# EAGLE board PrelimanaryV2 (EAGLE 9.5.2)
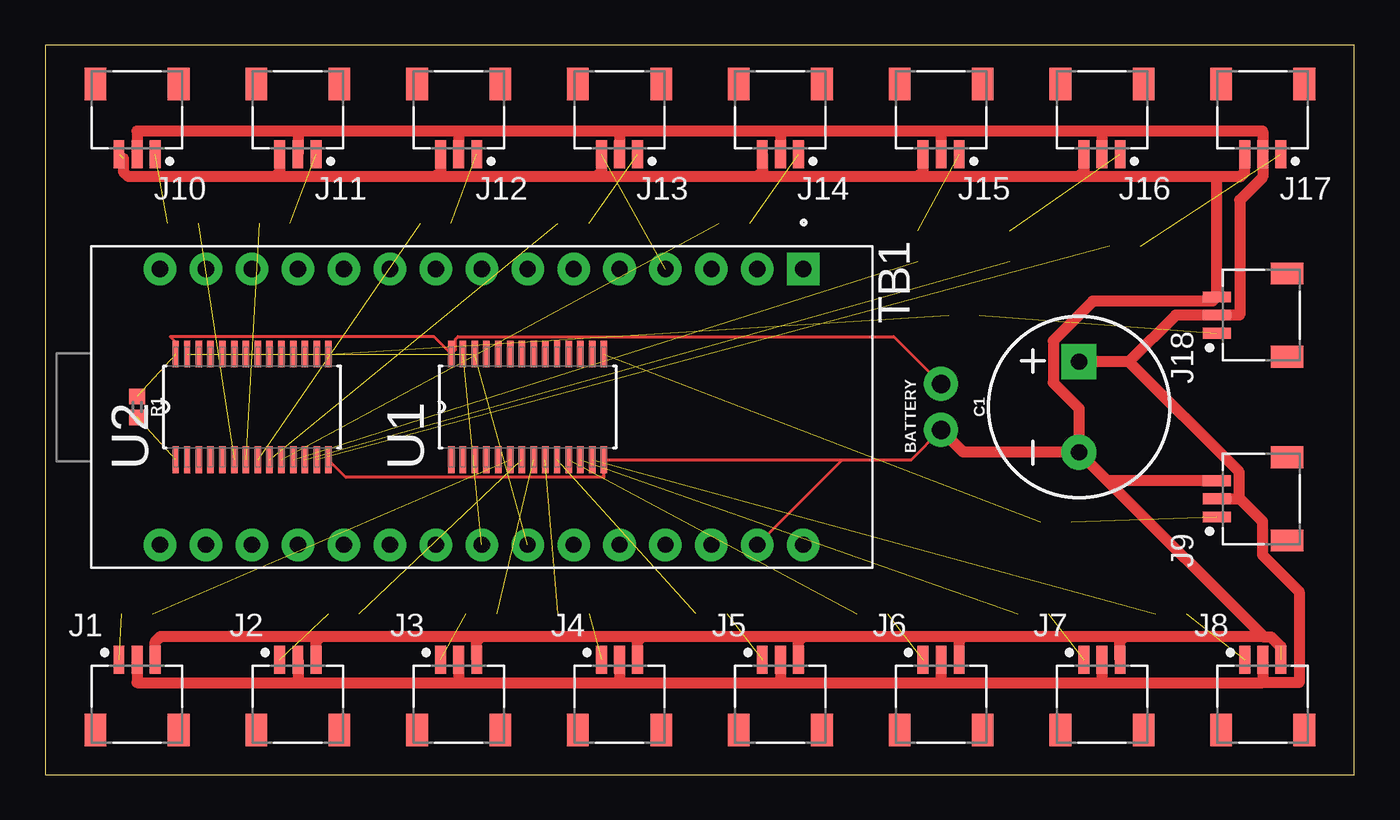
[diagram p0: board, top side]
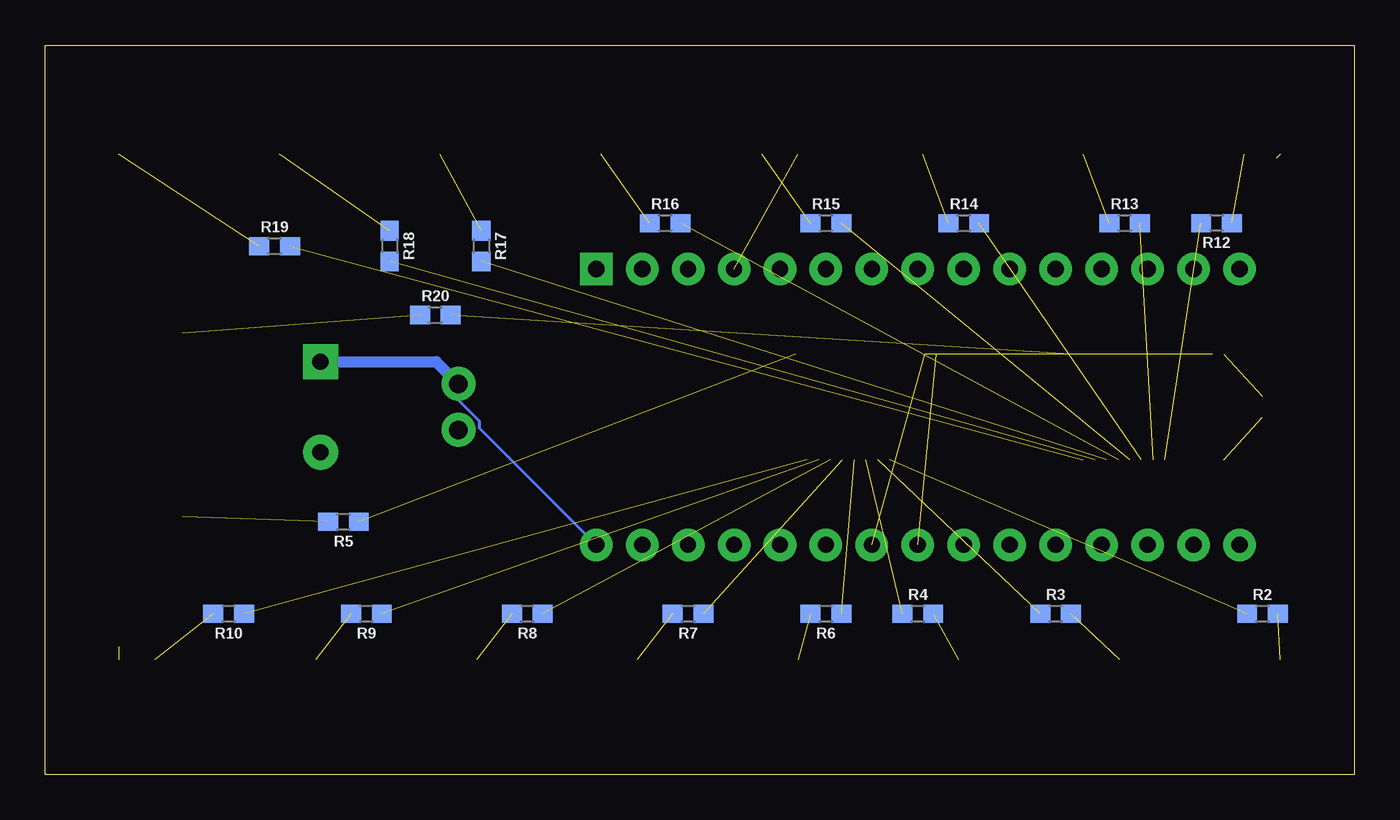
[diagram p1: board, bottom side, seen from below]

Size 72.37 x 40.31 mm. Coordinates in mm from the lower left corner, seen from the top.
Outline: 0,0 72.37,0 72.37,40.31 0,40.31 0,0
Copper layers (1*16): Top 0.035mm / dielectric 1.5mm / Bottom 0.035mm
Design rules "default": minimum track width 6mil, minimum drill 0.35mm, track to track 6mil, track to pad 6mil, pad to pad 6mil, via to via 6mil, smd to smd 6mil, copper to edge 40mil, drill to drill 6mil, minimum pad ring 10mil, minimum via ring 8mil, stop-mask expansion 4mil, vias tented up to drill 0mil, thermal gap 10mil

## Footprints (pad centres in the part's own frame; a part is rotated, then mirrored left to right if it is on the bottom)
1X02_NO_SILK = drill 1.016 pad 1.88: 1 0,0; 2 2.54,0
CPOL-RADIAL-5MM-10MM = drill 0.9 pad 1.93 square: + 2.5,0 | drill 0.9 pad 1.93: - -2.5,0
JST_SM03B-SRSS-TB(LF)(SN) = smd 0.6 x 1.55: 1 -1,0; 2 0,0; 3 1,0 | smd 1.2 x 1.8: S1 -2.3,-3.875; S2 2.3,-3.875
0402 = smd 0.85 x 0.9: 1 -0.58,0; 2 0.58,0
0603 = smd 1.1 x 1: 1 -0.85,0; 2 0.85,0
SHIELD_ARDUINO_NANO = drill 0.9 pad 1.8 square: 1 -7.62,17.78 | drill 0.9 pad 1.8: 2 -7.62,15.24; 3 -7.62,12.7; 4 -7.62,10.16; 5 -7.62,7.62; 6 -7.62,5.08; 7 -7.62,2.54; 8 -7.62,0; 9 -7.62,-2.54; 10 -7.62,-5.08; 11 -7.62,-7.62; 12 -7.62,-10.16; 13 -7.62,-12.7; 14 -7.62,-15.24; 15 -7.62,-17.78; 16 7.62,-17.78; 17 7.62,-15.24; 18 7.62,-12.7; 19 7.62,-10.16; 20 7.62,-7.62; 21 7.62,-5.08; 22 7.62,-2.54; 23 7.62,0; 24 7.62,2.54; 25 7.62,5.08; 26 7.62,7.62; 27 7.62,10.16; 28 7.62,12.7; 29 7.62,15.24; 30 7.62,17.78
SOP65P640X110-28N = smd 1.473 x 0.356: 1 -2.921,4.216; 2 -2.921,3.581; 3 -2.921,2.921; 4 -2.921,2.286; 5 -2.921,1.626; 6 -2.921,0.965; 7 -2.921,0.33; 8 -2.921,-0.33; 9 -2.921,-0.965; 10 -2.921,-1.626; 11 -2.921,-2.286; 12 -2.921,-2.921; 13 -2.921,-3.581; 14 -2.921,-4.216; 15 2.921,-4.216; 16 2.921,-3.581; 17 2.921,-2.921; 18 2.921,-2.286; 19 2.921,-1.626; 20 2.921,-0.965; 21 2.921,-0.33; 22 2.921,0.33; 23 2.921,0.965; 24 2.921,1.626; 25 2.921,2.286; 26 2.921,2.921; 27 2.921,3.581; 28 2.921,4.216

## Placement (x,y rotation side)
BATTERY  [1X02_NO_SILK]  49.53,19.05 90 top
C1  1mF  [CPOL-RADIAL-5MM-10MM]  57.15,20.32 90 top
J1  SM03B-SRSS-TB(LF)(SN)  [JST_SM03B-SRSS-TB(LF)(SN)]  5.08,6.35 0 top
J2  SM03B-SRSS-TB(LF)(SN)  [JST_SM03B-SRSS-TB(LF)(SN)]  13.97,6.35 0 top
J3  SM03B-SRSS-TB(LF)(SN)  [JST_SM03B-SRSS-TB(LF)(SN)]  22.86,6.35 0 top
J4  SM03B-SRSS-TB(LF)(SN)  [JST_SM03B-SRSS-TB(LF)(SN)]  31.75,6.35 0 top
J5  SM03B-SRSS-TB(LF)(SN)  [JST_SM03B-SRSS-TB(LF)(SN)]  40.64,6.35 0 top
J6  SM03B-SRSS-TB(LF)(SN)  [JST_SM03B-SRSS-TB(LF)(SN)]  49.53,6.35 0 top
J7  SM03B-SRSS-TB(LF)(SN)  [JST_SM03B-SRSS-TB(LF)(SN)]  58.42,6.35 0 top
J8  SM03B-SRSS-TB(LF)(SN)  [JST_SM03B-SRSS-TB(LF)(SN)]  67.31,6.35 0 top
J9  SM03B-SRSS-TB(LF)(SN)  [JST_SM03B-SRSS-TB(LF)(SN)]  64.77,15.24 90 top
J10  SM03B-SRSS-TB(LF)(SN)  [JST_SM03B-SRSS-TB(LF)(SN)]  5.08,34.29 180 top
J11  SM03B-SRSS-TB(LF)(SN)  [JST_SM03B-SRSS-TB(LF)(SN)]  13.97,34.29 180 top
J12  SM03B-SRSS-TB(LF)(SN)  [JST_SM03B-SRSS-TB(LF)(SN)]  22.86,34.29 180 top
J13  SM03B-SRSS-TB(LF)(SN)  [JST_SM03B-SRSS-TB(LF)(SN)]  31.75,34.29 180 top
J14  SM03B-SRSS-TB(LF)(SN)  [JST_SM03B-SRSS-TB(LF)(SN)]  40.64,34.29 180 top
J15  SM03B-SRSS-TB(LF)(SN)  [JST_SM03B-SRSS-TB(LF)(SN)]  49.53,34.29 180 top
J16  SM03B-SRSS-TB(LF)(SN)  [JST_SM03B-SRSS-TB(LF)(SN)]  58.42,34.29 180 top
J17  SM03B-SRSS-TB(LF)(SN)  [JST_SM03B-SRSS-TB(LF)(SN)]  67.31,34.29 180 top
J18  SM03B-SRSS-TB(LF)(SN)  [JST_SM03B-SRSS-TB(LF)(SN)]  64.77,25.4 90 top
R1  10k  [0402]  5.08,20.32 270 top
R2  220  [0603]  5.08,8.89 0 bottom
R3  220  [0603]  16.51,8.89 0 bottom
R4  220  [0603]  24.13,8.89 0 bottom
R5  220  [0603]  55.88,13.97 180 bottom
R6  220  [0603]  29.21,8.89 180 bottom
R7  220  [0603]  36.83,8.89 180 bottom
R8  220  [0603]  45.72,8.89 180 bottom
R9  220  [0603]  54.61,8.89 180 bottom
R10  220  [0603]  62.23,8.89 180 bottom
R12  220  [0603]  7.62,30.48 180 bottom
R13  220  [0603]  12.7,30.48 0 bottom
R14  220  [0603]  21.59,30.48 0 bottom
R15  220  [0603]  29.21,30.48 0 bottom
R16  220  [0603]  38.1,30.48 0 bottom
R17  220  [0603]  48.26,29.21 270 bottom
R18  220  [0603]  53.34,29.21 270 bottom
R19  220  [0603]  59.69,29.21 0 bottom
R20  220  [0603]  50.8,25.4 0 bottom
TB1  ARDUINO_NANO  [SHIELD_ARDUINO_NANO]  24.13,20.32 270 top
U1  PCA9685PW,118  [SOP65P640X110-28N]  26.67,20.32 90 top
U2  PCA9685PW,118  [SOP65P640X110-28N]  11.43,20.32 90 top

## Library data of the parts
BATTERY = SparkFun-Connectors
C1 = SparkFun-Capacitors; PROD_ID: CAP-09538
J1-J18 = JST-SH; AVAILABILITY: Unavailable; DESCRIPTION: CONN HEADER SMD R/A 3POS 1MM; MF: JST Sales; MP: SM03B-SRSS-TB_LF__SN_; PACKAGE: None; PRICE: None
R1 = SparkFun-Resistors; PROD_ID: RES-14241
R2-R10 R12-R20 = SparkFun-Resistors; PROD_ID: RES-07861
TB1 = ARDUINO_NANO; AVAILABILITY: Unavailable; DESCRIPTION: Dev.kit: Arduino; UART; ICSP, USB B mini, pin strips; MF: Arduino; MP: ARDUINO NANO; PACKAGE: None; PRICE: None
U1 U2 = PCA9685PW_118; AVAILABILITY: Unavailable; DESCRIPTION: PCA9685 Series 5.5V 25 mA 1 MHz 12-bit PWM Fm+I2C-Bus LED Controller - TSSOP-28; MF: NXP USA; MP: PCA9685PW,118; PACKAGE: TSSOP-28 NXP Semiconductors; PRICE: None

## Nets
3V3: TB1.17
+5V: TB1.27
AREF: TB1.18
N$1: R2.1 U1.6
N$2: J2.1 R3.2
N$3: J3.1 R4.2
N$4: BATTERY.1 C1.- J1.3 J2.3 J3.3 J4.3 J5.3 J6.3 J7.3 J8.3 J9.3 J10.3 J11.3 J12.3 J13.3 J14.3 J15.3 J16.3 J17.3 J18.3 TB1.4 TB1.29 U1.14 U2.14
N$5: TB1.23 U1.27 U2.27
N$6: TB1.24 U1.26 U2.26
N$7: J1.1 R2.2
N$8: J4.1 R6.2
N$9: J5.1 R7.2
N$10: J6.1 R8.2
N$11: J7.1 R9.2
N$12: J8.1 R10.2
N$13: J9.1 R5.2
N$14: J10.1 R12.1
N$15: J11.1 R13.1
N$16: J12.1 R14.1
N$17: J13.1 R15.1
N$18: J14.1 R16.1
N$19: J15.1 R17.1
N$20: J16.1 R18.1
N$21: J17.1 R19.1
N$22: J18.1 R20.1
N$23: BATTERY.2 C1.+ J1.2 J2.2 J3.2 J4.2 J5.2 J6.2 J7.2 J8.2 J9.2 J10.2 J11.2 J12.2 J13.2 J14.2 J15.2 J16.2 J17.2 J18.2 R1.1 TB1.30 U1.28 U2.28
N$24: R3.1 U1.7
N$25: R4.1 U1.8
N$26: R6.1 U1.9
N$27: R7.1 U1.10
N$28: R8.1 U1.11
N$29: R9.1 U1.12
N$30: R10.1 U1.13
N$31: R12.2 U2.6
N$32: R13.2 U2.7
N$33: R15.2 U2.9
N$34: R16.2 U2.10
N$35: R17.2 U2.11
N$36: R18.2 U2.12
N$37: R19.2 U2.13
N$38: R20.2 U2.15
N$39: R14.2 U2.8
N$41: R5.1 U1.15
N$42: R1.2 U2.1

## Tracks (layer width: path | path; a pad name or v marks a point on that pad's centre or on a via)
N$1  (1 unrouted)
N$2  (1 unrouted)
N$3  (1 unrouted)
N$4  (3 unrouted)
  Top 0.152: U2.14 16.61,16.43 30.89,16.43 U1.14 44.07,17.4 | 44.07,17.4 47.88,17.4 BATTERY.1 | TB1.29 44.07,17.4
  Top 0.61: 68.31,7.07 67.76,7.62 67.35,7.62 67.33,7.64 | 12.7,33.06 4.59,33.06 4.32,33.33 4.32,34.05 | 12.7,33.06 21.59,33.06 | 21.59,33.06 30.48,33.06 | 30.48,33.06 39.37,33.06 | 39.37,33.06 48.26,33.06 | 48.26,33.06 57.15,33.06 | 57.15,33.06 64.77,33.06 | 64.77,33.06 66,33.06 66.04,33.02 66.31,33.29 J17.3 | 64.77,33.06 J18.3 64.53,26.16 57.91,26.16 55.73,23.97 55.73,21.66 57.15,20.24 C1.- | J11.3 12.97,33.33 12.7,33.06 | J12.3 21.86,33.33 21.59,33.06 | J13.3 30.75,33.33 30.48,33.06 | J14.3 39.64,33.33 39.37,33.06 | J15.3 48.53,33.33 48.26,33.06 | J16.3 57.42,33.33 57.15,33.06 | C1.- 50.76,17.82 BATTERY.1 | C1.- 58.44,16.53 58.73,16.24 | 58.73,16.24 67.33,7.64 | J1.3 6.08,7.35 6.37,7.64 15.24,7.64 | 15.24,7.64 24.13,7.64 | 24.13,7.64 33.02,7.64 | 33.02,7.64 41.91,7.64 | 41.91,7.64 50.8,7.64 | 50.8,7.64 59.69,7.64 | 59.69,7.64 67.33,7.64 | J2.3 14.97,7.37 15.24,7.64 | J3.3 23.86,7.37 24.13,7.64 | J4.3 32.75,7.37 33.02,7.64 | J5.3 41.64,7.37 41.91,7.64 | J6.3 50.53,7.37 50.8,7.64 | J7.3 59.42,7.37 59.69,7.64 | J9.3 58.73,16.24
N$5  (2 unrouted)
N$6  (2 unrouted)
N$7  (1 unrouted)
N$8  (1 unrouted)
N$9  (1 unrouted)
N$10  (1 unrouted)
N$11  (1 unrouted)
N$12  (1 unrouted)
N$13  (1 unrouted)
N$14  (1 unrouted)
N$15  (1 unrouted)
N$16  (1 unrouted)
N$17  (1 unrouted)
N$18  (1 unrouted)
N$19  (1 unrouted)
N$20  (1 unrouted)
N$21  (1 unrouted)
N$22  (1 unrouted)
N$23  (1 unrouted)
  Top 0.152: U2.28 7.21,23.9 6.91,24.21 21.49,24.21 U1.28 22.68,23.47 22.68,24.07 22.82,24.21 46.91,24.21 BATTERY.2
  Top 0.61: J8.2 67.31,5.08 | J1.2 5.08,5.08 13.97,5.08 | 13.97,5.08 22.86,5.08 | 22.86,5.08 31.75,5.08 | 31.75,5.08 40.64,5.08 | 40.64,5.08 49.53,5.08 | 49.53,5.08 58.42,5.08 | J2.2 13.97,5.08 | J3.2 22.86,5.08 | J4.2 31.75,5.08 | J5.2 40.64,5.08 | J6.2 49.53,5.08 | J7.2 58.42,5.08 | J10.2 5.08,35.56 13.97,35.56 | 58.42,35.56 67.31,35.56 J17.2 67.31,33.02 66.04,31.75 66.04,25.4 J18.2 62.49,25.4 59.91,22.82 | 58.42,35.56 49.53,35.56 | 49.53,35.56 40.64,35.56 | 40.64,35.56 31.75,35.56 | 31.75,35.56 22.86,35.56 | 22.86,35.56 13.97,35.56 | 13.97,35.56 J11.2 | 22.86,35.56 J12.2 | 31.75,35.56 J13.2 | 40.64,35.56 J14.2 | 49.53,35.56 J15.2 | 58.42,35.56 J16.2 | 58.42,5.08 67.31,5.08 | 67.31,5.08 69.33,5.08 69.33,10.11 67.29,12.15 67.29,13.99 66.04,15.24 | J9.2 66.04,15.24 | 66.04,15.24 66,15.28 66,16.73 59.91,22.82 | 59.91,22.82 C1.+
  Bottom 0.152: TB1.30 48.36,19.15 48.36,19.53 49.53,20.7 BATTERY.2
  Bottom 0.61: C1.+ 50.76,22.82 BATTERY.2
N$24  (1 unrouted)
N$25  (1 unrouted)
N$26  (1 unrouted)
N$27  (1 unrouted)
N$28  (1 unrouted)
N$29  (1 unrouted)
N$30  (1 unrouted)
N$31  (1 unrouted)
N$32  (1 unrouted)
N$33  (1 unrouted)
N$34  (1 unrouted)
N$35  (1 unrouted)
N$36  (1 unrouted)
N$37  (1 unrouted)
N$38  (1 unrouted)
N$39  (1 unrouted)
N$41  (1 unrouted)
N$42  (1 unrouted)